# EAGLE board Hello_World (EAGLE 7.0.0)
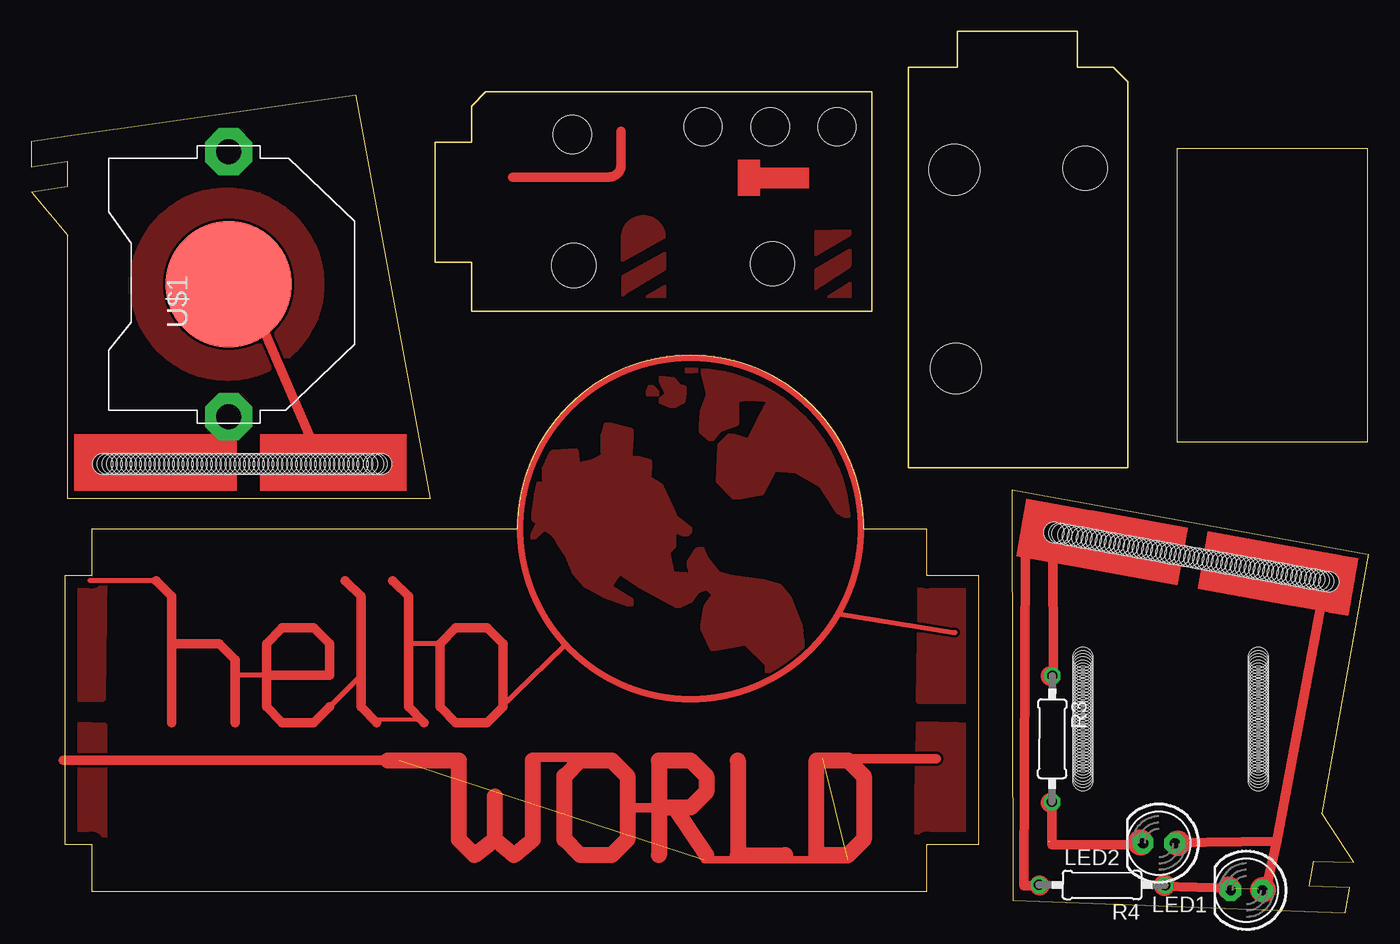
[diagram p0: board, top side]
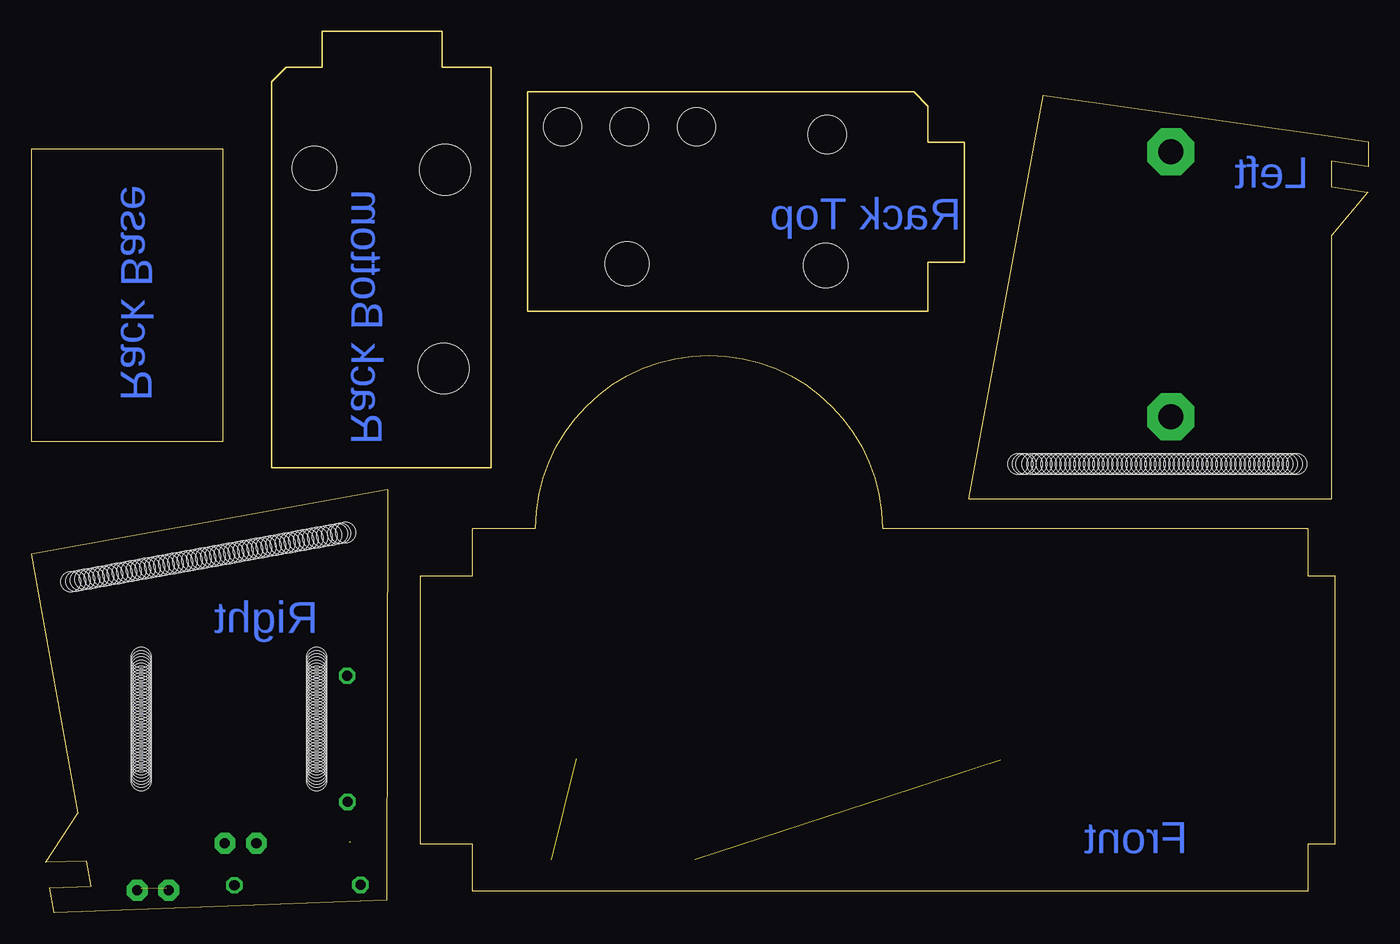
[diagram p1: board, bottom side, seen from below]

Size 107.76 x 71.01 mm. Coordinates in mm from the lower left corner, seen from the top.
Outline: 4.88,30.93 4.88,27.12 2.72,27.12 2.72,5.53 4.88,5.53 4.88,1.72 72.19,1.72 72.19,5.53 76.38,5.53 76.38,27.12 72.19,27.12 72.19,30.93 67.11,30.93 arc180 39.17,30.93 4.88,30.93
Outline: 32.18,33.34 2.97,33.34 2.97,54.55 0.05,58 2.97,58.49 2.97,60.52 0,60.06 0,62.09 2.97,62.55 26.21,65.85 32.18,33.34
Outline: 35.48,48.45 67.74,48.45 67.74,66.11 36.64,66.11 35.48,64.95 35.48,62.04 32.56,62.04 32.56,52.39 35.48,52.39 35.48,48.45
Outline: 70.71,68.09 70.71,35.83 88.37,35.83 88.37,66.93 87.21,68.09 84.3,68.09 84.3,71.01 74.65,71.01 74.65,68.09 70.71,68.09
Outline: 79.02,34.04 107.76,28.87 104.01,8 106.59,4.05 103.31,4.12 102.95,2.12 106.25,2 105.89,0 102.59,0.12 79.13,0.99 79.02,34.04
Outline: 107.7,37.91 107.7,61.51 92.3,61.51 92.3,37.91 107.7,37.91
Copper layers (1*16): Top 0.035mm / dielectric 1.5mm / Bottom 0.035mm
Design rules "default": minimum track width 10mil, minimum drill 24mil, track to track 8mil, track to pad 8mil, pad to pad 8mil, via to via 8mil, smd to smd 8mil, copper to edge 40mil, drill to drill 8mil, minimum pad ring 10mil, minimum via ring 8mil, stop-mask expansion 4mil, vias tented up to drill 0mil, thermal gap 10mil
Holes 1.6 mm at 5.77,36.13 28.24,36.13 6.15,36.13 6.53,36.13 6.91,36.13 7.29,36.13 7.67,36.13 8.05,36.13 8.43,36.13 8.81,36.13 9.19,36.13 9.58,36.13 9.96,36.13 10.34,36.13 10.72,36.13 11.1,36.13 11.48,36.13 11.86,36.13 12.24,36.13 12.62,36.13 13,36.13 13.39,36.13 13.77,36.13 14.15,36.13 14.53,36.13 14.91,36.13 15.29,36.13 15.67,36.13 16.05,36.13 16.43,36.13 16.81,36.13 17.2,36.13 17.58,36.13 17.96,36.13 18.34,36.13 18.72,36.13 19.1,36.13 19.48,36.13 19.86,36.13 20.24,36.13 20.62,36.13 21.01,36.13 21.39,36.13 21.77,36.13 22.15,36.13 22.53,36.13 22.91,36.13 23.29,36.13 23.67,36.13 24.05,36.13 24.43,36.13 24.82,36.13 25.2,36.13 25.58,36.13 25.96,36.13 26.34,36.13 26.72,36.13 27.1,36.13 27.86,36.13 27.61,36.13 104.55,26.64 82.43,30.62 104.18,26.7 103.8,26.77 103.43,26.84 103.05,26.91 102.68,26.97 102.3,27.04 101.93,27.11 101.55,27.18 101.18,27.24 100.8,27.31 100.43,27.38 100.05,27.45 99.68,27.51 99.3,27.58 98.93,27.65 98.55,27.72 98.18,27.78 97.8,27.85 97.43,27.92 97.05,27.99 96.68,28.05 96.3,28.12 95.93,28.19 95.55,28.26 95.18,28.32 94.8,28.39 94.43,28.46 94.05,28.53 93.68,28.59 93.3,28.66 92.93,28.73 92.55,28.8 92.18,28.86 91.8,28.93 91.43,29 91.05,29.07 90.68,29.13 90.3,29.2 89.93,29.27 89.55,29.34 89.18,29.4 88.8,29.47 88.43,29.54 88.05,29.61 87.68,29.67 87.3,29.74 86.93,29.81 86.55,29.88 86.18,29.94 85.8,30.01 85.43,30.08 85.05,30.15 84.68,30.21 84.3,30.28 83.93,30.35 83.55,30.42 82.8,30.55 83.05,30.51 98.88,20.55 98.88,20.3 98.88,20.04 98.88,19.79 98.88,19.53 98.88,19.28 98.88,19.03 98.88,18.77 98.88,18.52 98.88,18.26 98.88,18.01 98.88,17.76 98.88,17.5 98.88,17.25 98.88,16.99 98.88,16.74 98.88,16.49 98.88,16.23 98.88,15.98 98.88,15.72 98.88,15.47 98.88,15.22 98.88,14.96 98.88,14.71 98.88,14.45 98.88,14.2 98.88,13.95 98.88,13.69 98.88,13.44 98.88,13.18 98.88,12.93 98.88,12.68 98.88,12.42 98.88,12.17 98.88,11.91 98.88,11.66 98.88,11.41 98.88,11.15 98.88,10.9 98.88,10.64 84.76,20.55 84.76,20.3 84.76,20.04 84.76,19.79 84.76,19.53 84.76,19.28 84.76,19.03 84.76,18.77 84.76,18.52 84.76,18.26 84.76,18.01 84.76,17.76 84.76,17.5 84.76,17.25 84.76,16.99 84.76,16.74 84.76,16.49 84.76,16.23 84.76,15.98 84.76,15.72 84.76,15.47 84.76,15.22 84.76,14.96 84.76,14.71 84.76,14.45 84.76,14.2 84.76,13.95 84.76,13.69 84.76,13.44 84.76,13.18 84.76,12.93 84.76,12.68 84.76,12.42 84.76,12.17 84.76,11.91 84.76,11.66 84.76,11.41 84.76,11.15 84.76,10.9 84.76,10.64
Holes 3.05 mm at 43.61,62.68 59.56,63.31 54.15,63.31 64.95,63.31
Holes 3.56 mm at 43.74,52.14 59.74,52.26 84.94,59.96
Holes 4.06 mm at 74.52,43.83 74.4,59.83
vRestrict: area -1.3,-0.7 to 125.7,100.9

## Footprints (pad centres in the part's own frame; a part is rotated, then mirrored left to right if it is on the bottom)
LED5MM = drill 0.813 pad 1.676 octagon: A -1.27,0; K 1.27,0
0207/10 = drill 0.813 octagon: 1 -5.08,0; 2 5.08,0
CR2032-THRU = drill 2 pad 3.81 octagon: +1 -10.668,0; +2 10.668,0 | smd 10.16 x 10.16: - 0,0

## Placement (x,y rotation side)
LED1  [LED5MM]  97.93,1.8 179.8 top
LED2  [LED5MM]  90.88,5.59 179.8 top
R3  [0207/10]  82.28,14 269.8 top
R4  [0207/10]  86.3,2.22 179.8 top
U$1  [CR2032-THRU]  15.93,50.61 90 top

## Library data of the parts
LED1 LED2 U$1 = adafruit
R3 R4 = resistor

## Tracks (layer width: path | path; a pad name or v marks a point on that pad's centre or on a via)
N$1
  Top 0.406: 10.08,26.74 4.75,26.74
  Top 0.762: 10.08,26.74 11.35,25.47 11.35,21.66 | 11.35,21.66 11.35,15.31 | 11.35,21.66 15.16,21.66 16.43,20.39 16.43,15.31
N$2
  Top 0.406: 19.35,19.12 16.69,19.12 | 24.05,16.58 26.47,18.99
  Top 0.762: 18.97,19.12 19.35,19.12 24.05,19.12 24.05,21.66 22.78,22.93 20.24,22.93 18.97,21.66 18.97,19.12 | 18.97,19.12 18.97,16.58 20.24,15.31 22.78,15.31 24.05,16.58
N$3
  Top 0.762: 25.32,26.74 26.59,25.47 26.59,16.58 27.86,15.31
N$4
  Top 0.762: 29.13,26.74 30.4,25.47 30.4,16.58 31.67,15.31
N$5
  Top 0.762: 32.94,21.66 34.21,22.93 36.75,22.93 38.02,21.66 38.02,16.58 36.75,15.31 34.21,15.31 32.94,16.58 32.94,21.66
N$6
  Top 1.27: 28.75,12.26 34.47,12.26 34.47,5.91 35.74,4.64 37.39,5.91 | 37.39,5.91 37.39,9.34 | 37.39,5.91 38.91,4.64 40.44,5.91 40.44,12.26
N$7
  Top 1.27: 42.98,10.99 44.25,12.26 46.79,12.26 48.06,10.99 48.06,5.91 46.79,4.64 44.25,4.64 42.98,5.91 42.98,10.99
N$8
  Top 0.762: 51.23,8.45 48.44,8.45
  Top 1.27: 50.6,8.45 50.6,12.26 53.14,12.26 54.41,10.99 54.41,9.72 53.14,8.45 51.87,8.45 | 50.6,8.45 50.6,4.64 | 51.87,8.45 51.23,8.45 50.6,8.45 | 51.87,8.45 54.41,4.64
N$9
  Top 1.27: 56.95,12.26 56.95,4.64 60.76,4.64
N$10
  Top 1.27: 63.3,4.64 63.3,12.26 65.84,12.26 67.11,10.99 67.11,5.91 65.84,4.64 63.3,4.64
N$11
  pour Top: 40.31,33.72 40.31,32.71 40.56,31.69 40.94,31.44 40.31,30.04 41.33,31.05 42.09,30.55 42.34,30.29 42.6,29.78 43.36,28.64 43.87,27.37 44.75,26.36 45.52,25.97 46.15,25.59 48.31,24.83 48.44,25.09 46.53,26.23 47.42,27.5 49.07,26.36 52.12,24.7 53.14,25.21 53.64,25.97 54.41,26.23 55.17,25.59 54.41,24.58 54.15,22.93 54.91,21.28 56.31,21.53 57.58,21.78 59.36,20.01 59.36,19.12 60.12,19.12 61.14,19.75 62.15,20.64 61.9,23.05 61.01,25.34 60.25,26.23 58.98,26.61 56.31,26.99 55.3,27.24 54.41,28.39 54.03,29.28 53.64,29.15 53.01,28.13 53.39,27.12 51.61,27.24 51.23,29.02 51.74,29.53 51.74,30.93 52.76,30.42 53.14,30.8 51.87,31.82 51.49,32.71 50.72,34.36 49.71,34.99 49.83,36.26 48.95,36.52 48.18,36.52 48.31,38.17 48.31,38.8 46.41,39.31 46.15,38.42 46.15,36.77 45.26,36.26 43.99,36.01 43.87,37.15 42.09,37.02 41.33,36.39 41.45,34.48 40.94,34.48 40.44,34.61
N$12
  pour Top: 54.15,43.75 54.66,41.72 54.15,40.33 54.03,38.8 54.79,38.17 55.42,38.93 56.06,39.18 56.82,39.44 56.82,41.34 57.84,41.47 59.61,41.34 58.72,39.69 57.84,37.91 56.31,38.42 55.55,37.66 55.42,34.74 56.69,33.47 58.85,33.85 59.87,35.75 61.65,35.63 63.68,34.48 65.07,32.32 66.47,31.56 66.47,33.59 65.58,36.39 64.57,38.42 63.04,40.45 61.26,41.98 58.6,43.5 56.18,44.39 54.79,44.39 53.9,44.52 52.25,44.52 52.88,43.63
N$13
  pour Top: 51.74,42.87 52.12,42.36 52.63,42.23 52.5,41.21 51.74,40.83 50.72,41.21 51.36,41.72 50.72,42.99
N$14
  pour Top: 49.96,42.36 49.71,41.85 50.47,41.85
N$15
  pour Top: 2.72,27.12 2.72,17.21 5.77,17.21 5.89,27.24
  pour Top: 2.72,15.18 2.72,5.4 5.89,5.4 5.89,15.05
  pour Top: 71.68,24.7 71.55,17.08 76.25,17.08 76.38,27.12 71.68,27.12
  pour Top: 71.42,9.46 71.42,5.15 76.12,5.02 76.25,15.05 71.55,15.18 71.55,14.67
N$16
  Top 0.762: 40.44,12.51 44.37,12.51
N$17
  Top 0.406: 33.07,21.66 30.53,21.66
N$18
  Top 0.762: 22.78,37.66 17.2,50.49
N$19
  Top 0.762: 13.26,38.04 13.26,38.17 15.93,38.17
N$20  (1 unrouted)
  Top 0.762: 103.99,25.13 100.37,5.76 | 100.37,5.76 99.5,1.83 98.87,1.94 | 100.37,5.76 91.84,5.62 | 96.89,1.95 90.98,2.11
N$21
  pour Top: 47.65,48.43 51.08,48.43 51.08,50.46
N$22
  Top 0.762: 82.37,19.53 82.32,29.8
N$23
  Top 0.762: 81.44,2.18 80.02,2.18 80.11,29.23
N$24  (1 unrouted)
N$25
  Top 0.406: 65.07,24.07 74.47,22.55
N$26
  Top 0.406: 37.64,16.32 42.98,21.53
N$27  (2 unrouted)
  Top 0.584: 54.28,4.26 65.84,4.26
  Top 0.762: 63.8,12.39 72.95,12.39 | 2.59,12.26 29.64,12.26
N$28
  pour Top: 15.93,42.99 15.8,42.99 arc-183 16.18,58.23 arc-176
N$29
  Top 0.305: 27.48,15.56 31.42,15.56
N$30
  Top 0.762: 38.79,59.25 46.56,59.25 arc90 47.55,60.24 47.55,62.93
N$31
  pour Top: 63.2,48.43 66.01,48.35 66.01,50.71 63.2,48.94
N$32
  pour Top: 63.7,50.59 66.01,52.11 66.01,53.38 63.2,51.73 63.2,50.21
N$33
  pour Top: 63.2,53 66.01,54.65 66.01,54.91 63.2,54.85
N$34
  pour Top: 48.16,50.08 51.08,51.86 51.08,53.13 47.65,51.22 47.65,49.7
N$36
  pour Top: 47.65,52.49 47.65,54.4 arc-180 51.03,54.4
S$1
  Top 0.762: 89.46,5.45 82.24,5.45 82.24,8.68
(copper drawn outside any net)
  shapes: Top area x13, Top circle x13

## Text on the board
Top: Version 4.4
Bottom: Left | Rack Top | Rack Base | Rack Bottom | Right | Front